# Altium PCB test_5.PcbDoc
Units mil, origin at the board's own origin, x right, y up, seen from the top; angles counter-clockwise.
Board outline 4412.04 x 5197.88 mil, 4 copper layers (Top Layer, Mid-Layer Top, Mid-Layer Bottom, Bottom Layer); 121 components, 95 nets, 430 pads, 38 vias.
Unrouted connection lines stored in the file: 182.
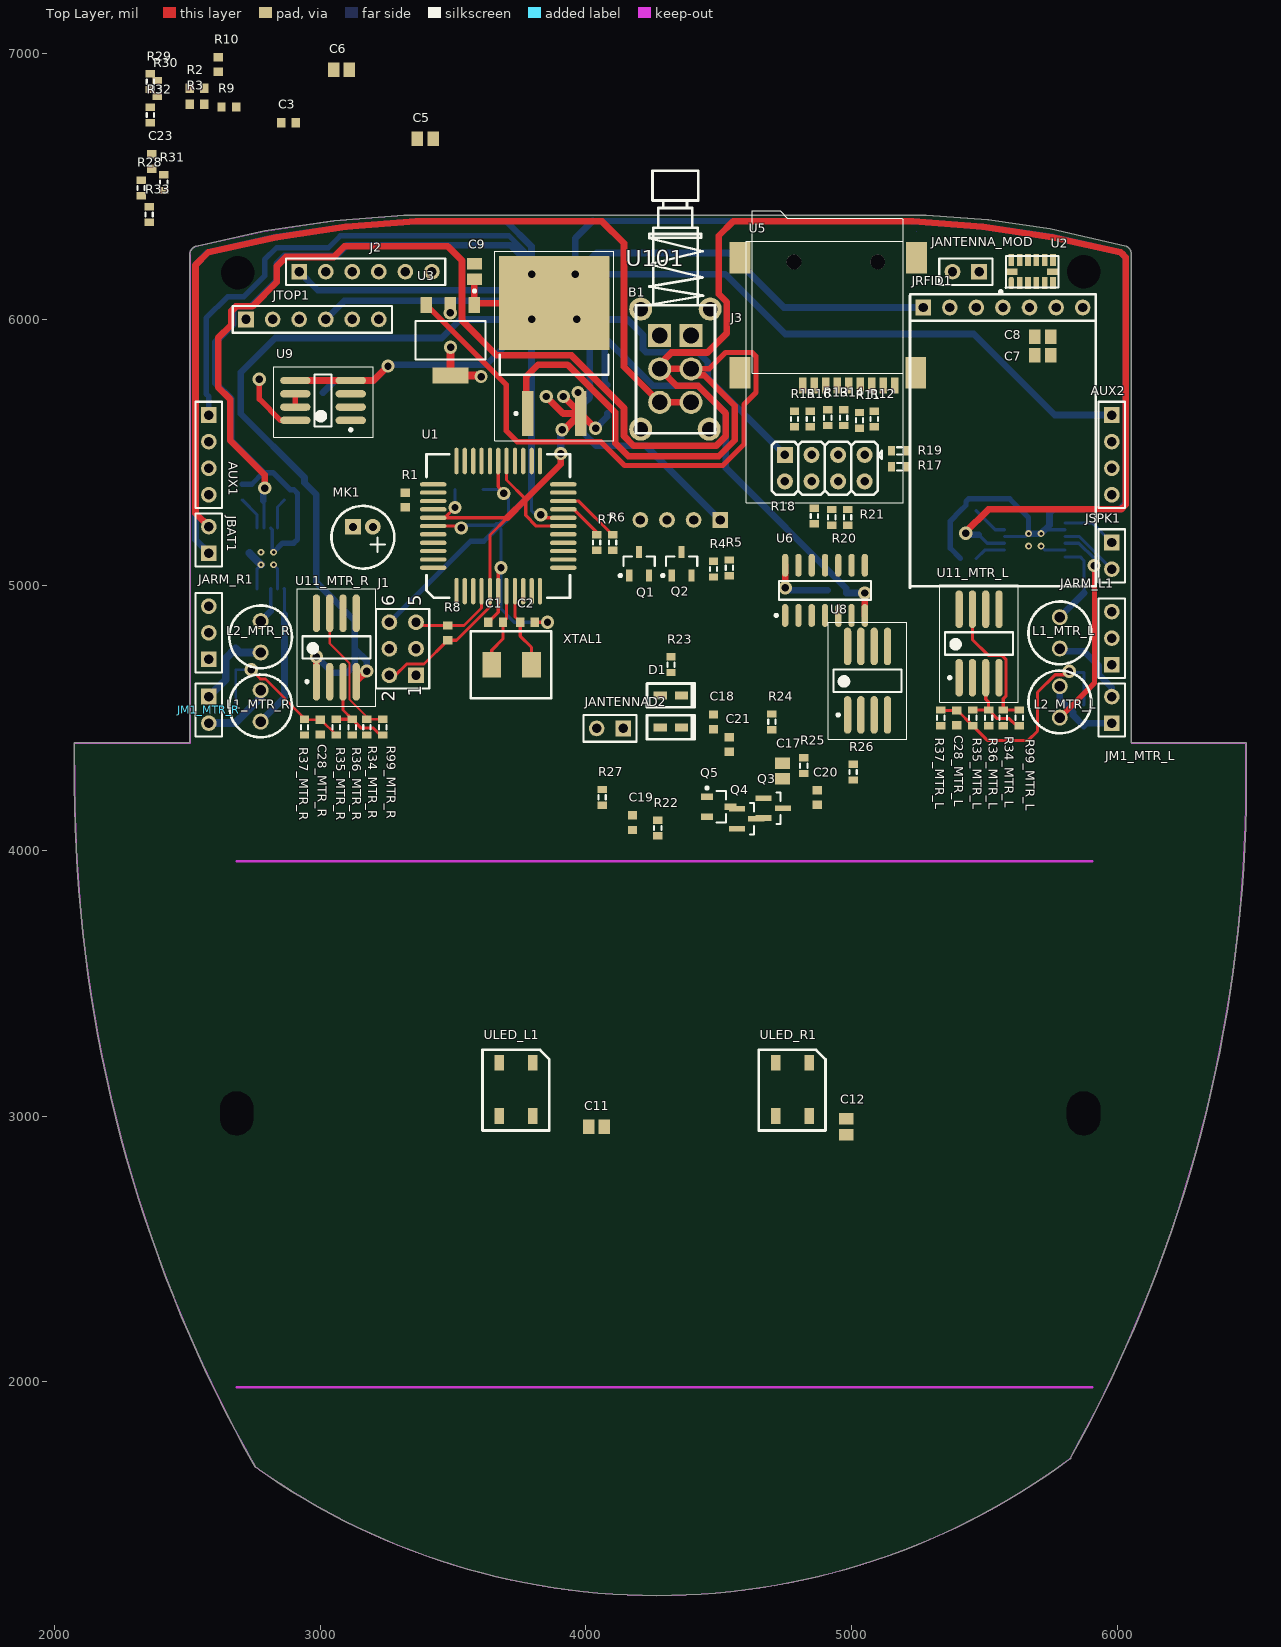
[diagram p0: Top Layer view]
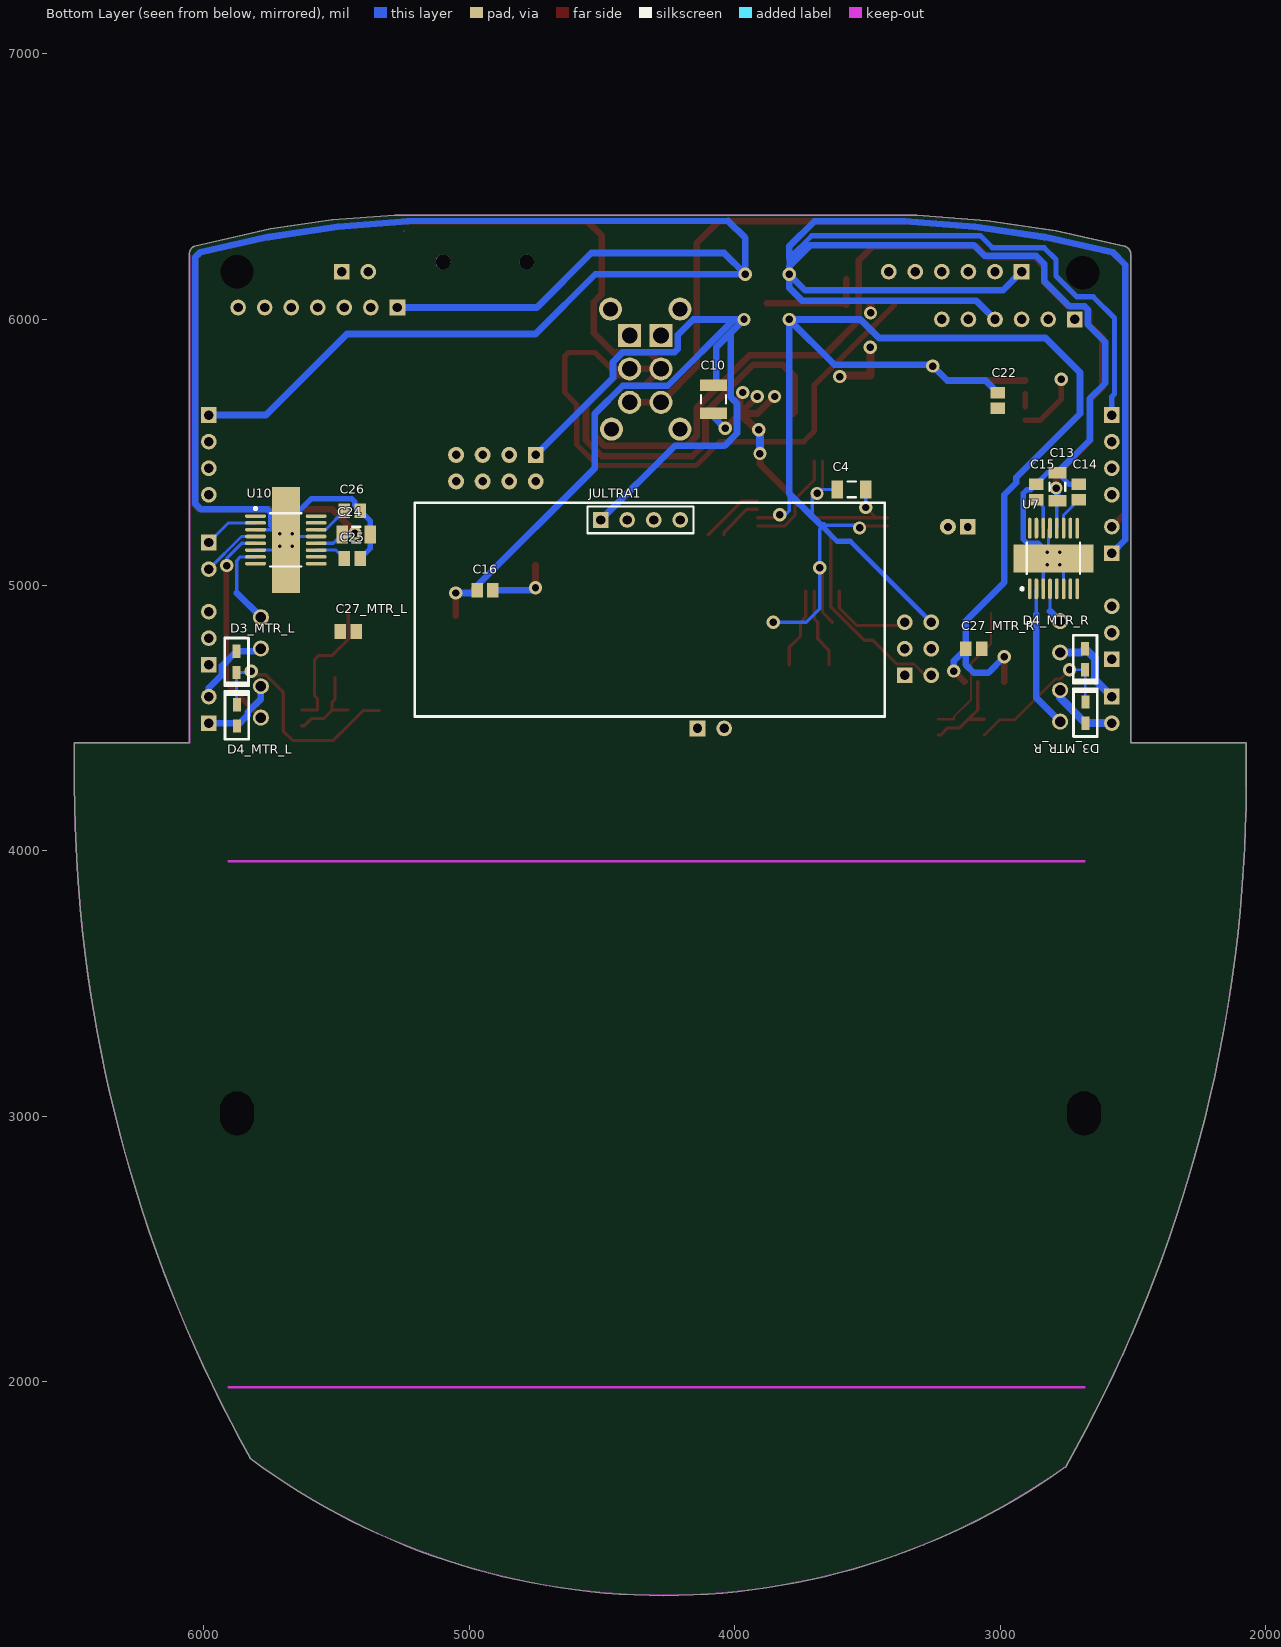
[diagram p1: Bottom Layer view, seen from below]
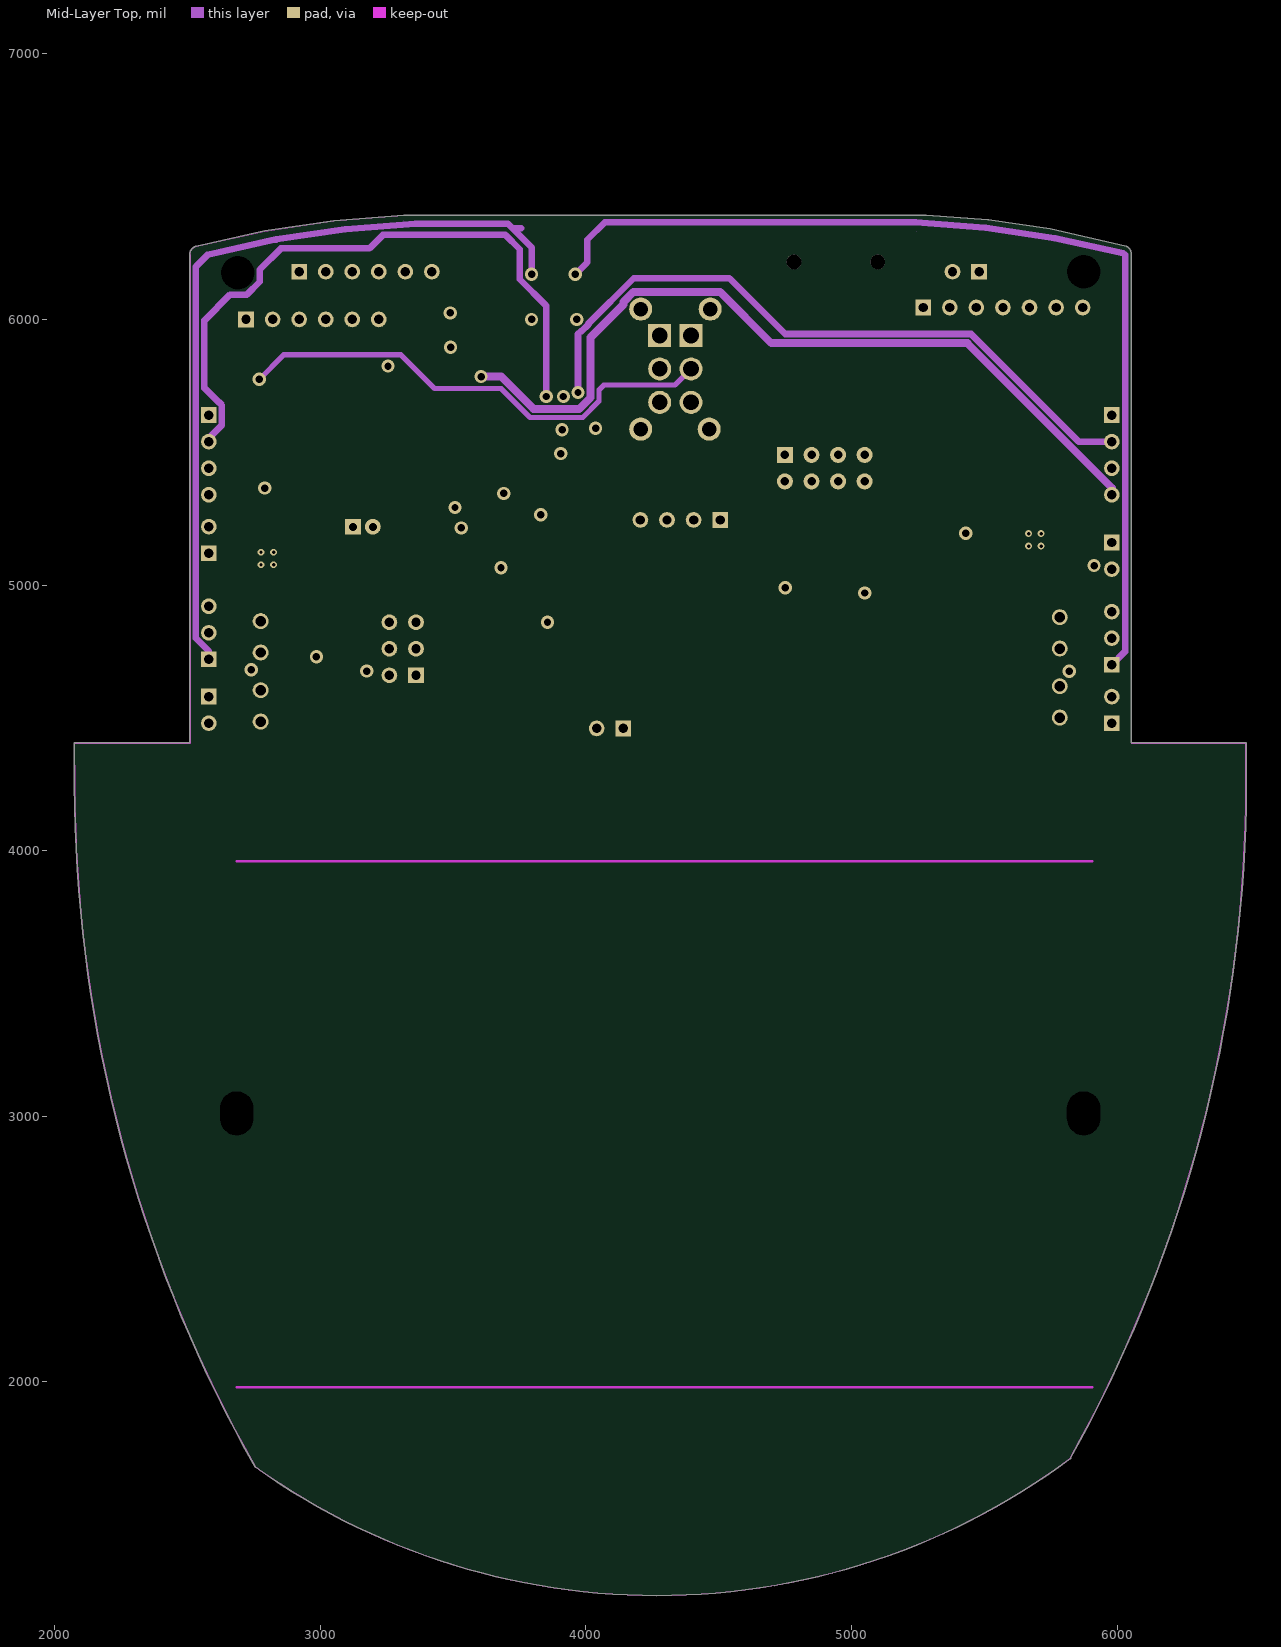
[diagram p2: Mid-Layer Top]
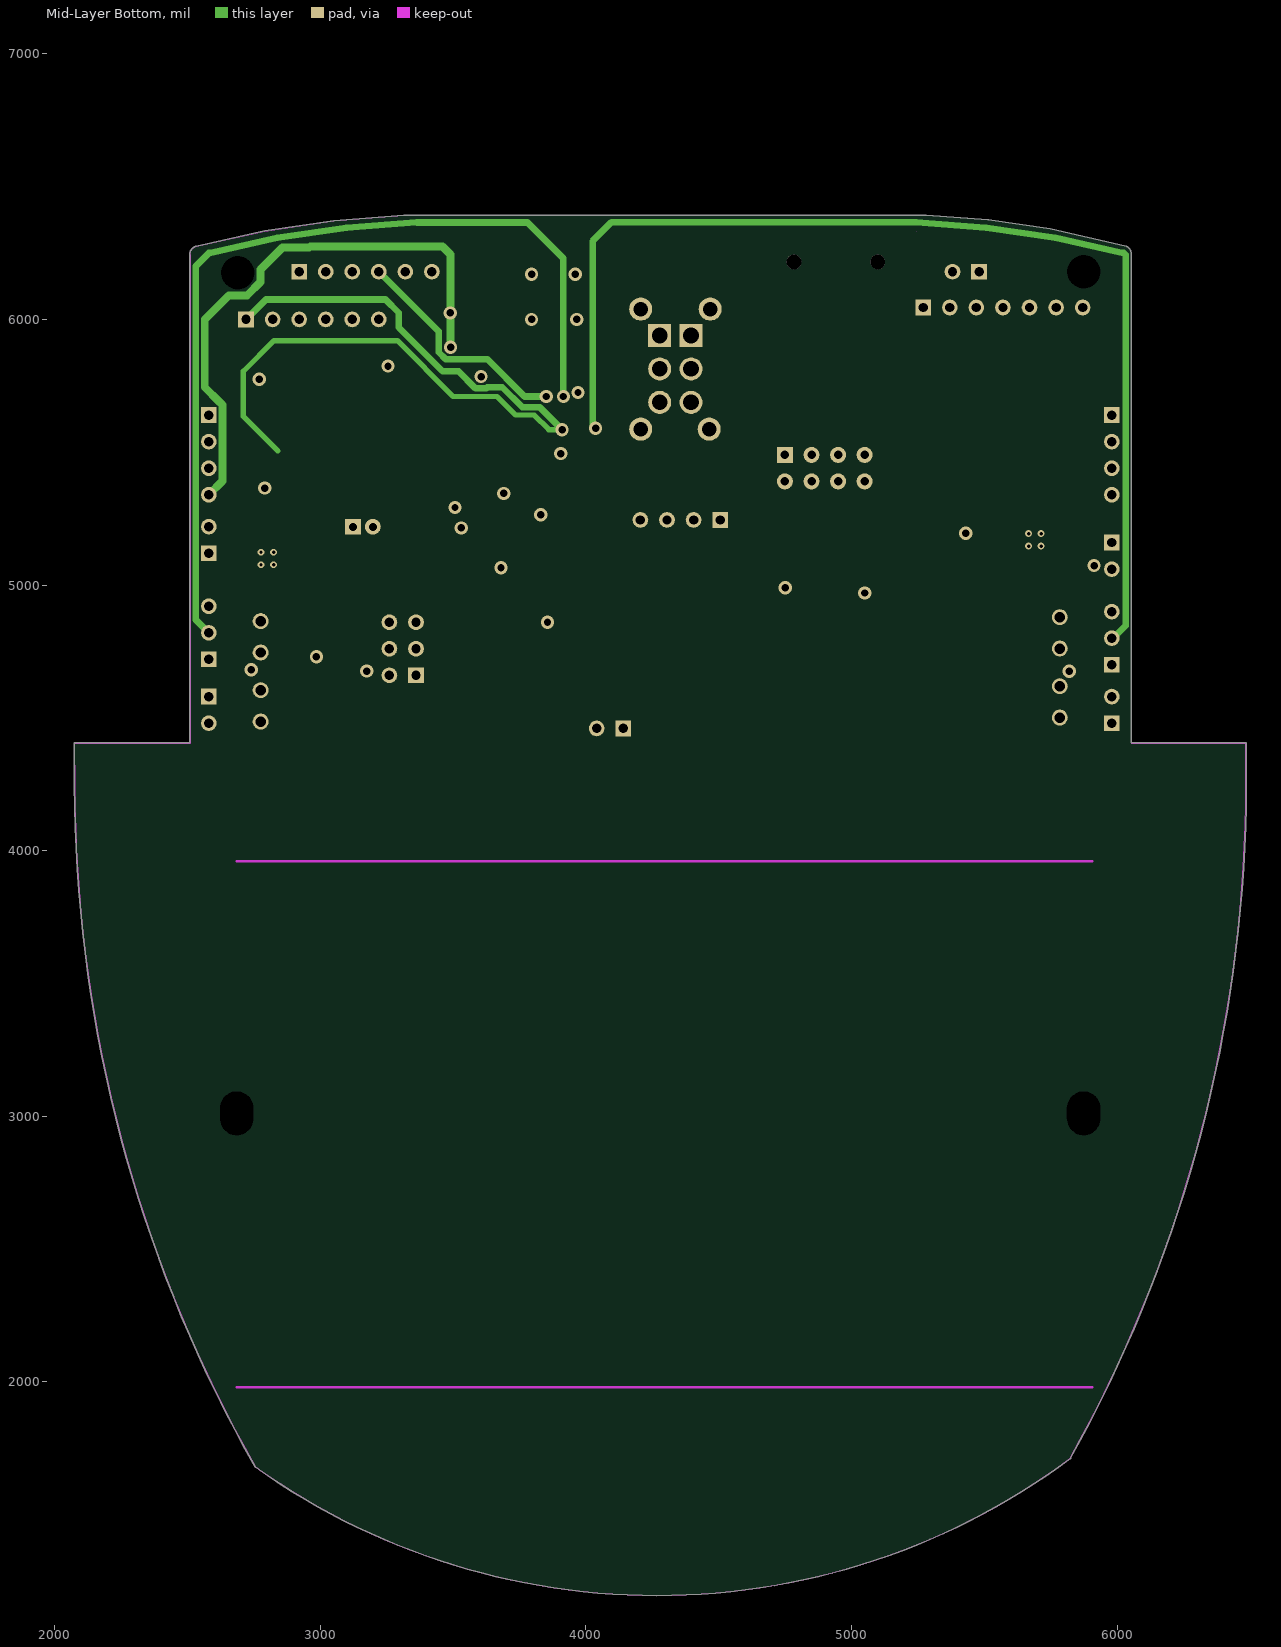
[diagram p3: Mid-Layer Bottom]

## Layer stack, top to bottom
Top Layer: signal copper 1.4
Dielectric: core 12.6, FR-4, Dk 4.8
Mid-Layer Top: signal copper 0.7
Dielectric: prepreg 12.6, FR-4, Dk 4.8
Mid-Layer Bottom: signal copper 0.7
Dielectric: core 12.6, FR-4, Dk 4.8
Bottom Layer: signal copper 1.4

## Board outline
2073.99,4249.98 cw(c7308.62,4260.06) 2073.99,4270.14 2073.99,4405 cw(c2075,4405) 2075,4406.02 2508.06,4406.02 2508.04,6244.45 cw(c2509.05,6244.45) 2508.04,6244.48 2508.11,6246.69 cw(c2509.13,6246.66) 2508.12,6246.76 2508.35,6248.96 cw(c2509.36,6248.85) 2508.36,6249.03 2508.74,6251.2 cw(c2509.74,6251.03) 2508.76,6251.26 cw(c2509.74,6251.03) 2508.76,6251.28 2509.29,6253.41 cw(c2510.28,6253.17) 2509.3,6253.42 2509.29,6253.42 cw(c2510.28,6253.17) 2509.31,6253.48 2510,6255.58 cw(c2510.96,6255.27) 2510.02,6255.65 2510.85,6257.7 cw(c2511.79,6257.32) 2510.88,6257.76 2511.84,6259.74 cw(c2512.76,6259.3) 2511.88,6259.81 2511.87,6259.8 cw(c2512.76,6259.3) 2511.88,6259.81 2512.97,6261.71 cw(c2513.86,6261.21) 2512.98,6261.73 cw(c2513.86,6261.21) 2513.02,6261.78 2513.01,6261.78 cw(c2513.86,6261.21) 2513.02,6261.79 2514.25,6263.61 cw(c2515.1,6263.04) 2514.26,6263.62 2514.25,6263.61 cw(c2515.1,6263.04) 2514.3,6263.67 2515.65,6265.41 cw(c2516.45,6264.78) 2515.7,6265.46 2517.18,6267.1 cw(c2517.93,6266.42) 2517.22,6267.15 cw(c2517.93,6266.42) 2517.23,6267.16 2518.81,6268.68 cw(c2519.52,6267.96) 2518.82,6268.7 cw(c2519.52,6267.96) 2518.87,6268.74 2520.56,6270.15 2520.56,6270.16 cw(c2521.21,6269.38) 2520.61,6270.2 cw(c2521.21,6269.38) 2520.62,6270.2 2522.39,6271.49 cw(c2523,6270.68) 2522.4,6271.5 cw(c2523,6270.68) 2522.46,6271.54 2524.33,6272.71 cw(c2524.87,6271.85) 2524.39,6272.74 2526.35,6273.78 cw(c2526.82,6272.88) 2526.41,6273.81 2526.42,6273.81 2528.42,6274.7 cw(c2528.84,6273.78) 2528.43,6274.71 cw(c2528.84,6273.78) 2528.52,6274.74 2531.81,6275.83 cw(c2532.65,6275.26) 2532.43,6276.25 2789.99,6333.21 cw(c2790.21,6332.22) 2790.06,6333.22 2790.07,6333.22 3050.97,6372.07 cw(c3051.13,6371.07) 3050.98,6372.08 cw(c3051.13,6371.07) 3051.05,6372.08 3314.4,6392.63 cw(c3315.24,6392.05) 3315.24,6393.06 5279.84,6393.06 cw(c5280.12,6392.09) 5280.2,6393.1 5514.78,6375.38 cw(c5514.71,6374.36) 5514.79,6375.37 cw(c5514.71,6374.36) 5514.85,6375.37 5514.86,6375.37 ccw(c5514.71,6374.36) 5514.85,6375.37 ccw(c5514.71,6374.36) 5514.78,6375.37 5514.86,6375.37 5747.62,6341.33 cw(c5747.48,6340.32) 5747.63,6341.33 5747.62,6341.33 cw(c5747.48,6340.32) 5747.7,6341.31 6034.58,6276.02 cw(c6034.35,6275.03) 6035.31,6275.36 6036.7,6274.64 cw(c6036.24,6273.74) 6036.71,6274.63 cw(c6036.24,6273.74) 6036.77,6274.6 6036.76,6274.61 ccw(c6036.24,6273.74) 6036.71,6274.64 6036.77,6274.6 6038.65,6273.46 6038.65,6273.45 cw(c6038.13,6272.59) 6038.71,6273.42 cw(c6038.13,6272.59) 6038.72,6273.41 6040.51,6272.14 cw(c6039.93,6271.31) 6040.52,6272.13 6040.51,6272.14 cw(c6039.93,6271.31) 6040.57,6272.09 6042.27,6270.69 cw(c6041.63,6269.91) 6042.33,6270.65 6042.32,6270.65 cw(c6041.63,6269.91) 6042.33,6270.64 6043.93,6269.14 cw(c6043.24,6268.39) 6043.94,6269.13 6043.93,6269.13 cw(c6043.24,6268.39) 6043.98,6269.08 6045.47,6267.46 cw(c6044.73,6266.77) 6045.52,6267.4 6046.9,6265.68 cw(c6046.11,6265.05) 6046.94,6265.62 6048.2,6263.81 cw(c6047.36,6263.23) 6048.23,6263.75 6048.24,6263.74 6049.36,6261.86 cw(c6048.49,6261.33) 6049.36,6261.85 cw(c6048.49,6261.33) 6049.39,6261.79 6050.38,6259.81 cw(c6049.48,6259.36) 6050.41,6259.75 6051.26,6257.71 cw(c6050.33,6257.32) 6051.29,6257.65 6051.99,6255.56 cw(c6051.03,6255.23) 6052.01,6255.49 6052.57,6253.36 cw(c6051.59,6253.1) 6052.59,6253.28 6052.99,6251.11 cw(c6052,6250.93) 6053,6251.04 6053.26,6248.86 cw(c6052.25,6248.74) 6053.27,6248.78 cw(c6052.25,6248.74) 6053.27,6248.74 6053.27,6248.78 6053.37,6246.22 cw(c6052.35,6246.18) 6053.37,6246.18 cw(c6052.35,6246.18) 6052.89,6245.31 cw(c6052.35,6244.45) 6053.37,6244.45 6053.37,4406.02 6485,4406.02 cw(c6485,4405) 6486.02,4405 6486.02,4245 cw(c6485,4245) 6486,4244.84 cw(c1251.38,4260.06) 5824.33,1712.58 cw(c5823.6,1711.88) 5824.62,1711.88 cw(c5823.6,1711.88) 5824.21,1711.06 cw(c4267.65,3801.61) 2755.04,1679.05 cw(c2755.11,1680.06) 2754.22,1679.56 cw(c7308.62,4260.06) 2074,4244.84 cw(c2075,4245) 2073.99,4245

## Design rules (kind name [scope] priority, off if disabled: settings)
Clearance [All] p1: gap=7
PolygonConnect [All] p1: connectstyle=Relief reliefconductorwidth=10 reliefentries=4 polygonreliefangle="90 Angle"
RoomDefinition QRFID [InComponentClass('QRFID')] p1: confinementstyle=ConfineIn formatcopy=TRUE lockcomponents=FALSE outline 3295,4385 5265,4385 5265,4850 3295,4850
RoomDefinition QMIC [InComponentClass('QMIC')] p2: confinementstyle=ConfineIn formatcopy=TRUE lockcomponents=FALSE outline 2730,5080 3355,5080 3355,5870 2730,5870
RoomDefinition MTR_R [InComponentClass('MTR_R')] p3: confinementstyle=ConfineIn formatcopy=TRUE lockcomponents=FALSE outline 2504.06,4415 3295,4415 3295,5065 2504.06,5065
RoomDefinition MTR_L [InComponentClass('MTR_L')] p4: confinementstyle=ConfineIn formatcopy=TRUE lockcomponents=FALSE outline 6045,5060 5270,5060 5270,4410 6045,4410
RoomDefinition main_pcb [InComponentClass('main_pcb')] p5: confinementstyle=ConfineIn formatcopy=TRUE lockcomponents=FALSE outline 2509.06,4385 6055,4385 6055,6595 2509.06,6595
RoutingVias [All] p1: holewidth=28 width=50 viastyle="Through Hole" minholewidth=28 minwidth=50 maxholewidth=28 maxwidth=50
SilkToSilkClearance [All] p1: silktosilkclearance=0
SilkscreenOverComponentPads [All] p1: minsilkscreentomaskgap=10
SolderMaskExpansion [All] p1: expansion=4
Width [All] p1: maxlimit=60 minlimit=7 preferedwidth=10 minimp=50.000000 maximp=50.000000 favimp=50.000000
26 further rules are at their usual default settings.

## Classes and differential pairs
component class main_pcb: AUX1 AUX2 B1 C1 C2 C3 C4 C5 C6 C7 C8 C9 C10 C11 C12 C13 C14 C15 C16 C24 C25 C26 J1 J2 J3 JANTENNA_MOD JARM_L1 JARM_R1 JBAT1 JRFID1 JSPK1 JTOP1 JULTRA1 Q1 Q2 R1 R2 R3 R4 R5 R6 R7 R8 R9 R10 R11 R12 R13 R14 R15 R16 R17 R18 R19 R20 R21 U1 U2 U3 U5 U6 U7 U10 U101 ULED_L1 ULED_R1 XTAL1
component class MTR_L: C27_MTR_L C28_MTR_L D3_MTR_L D4_MTR_L JM1_MTR_L L1_MTR_L L2_MTR_L R34_MTR_L R35_MTR_L R36_MTR_L R37_MTR_L R99_MTR_L U11_MTR_L
component class MTR_R: C27_MTR_R C28_MTR_R D3_MTR_R D4_MTR_R JM1_MTR_R L1_MTR_R L2_MTR_R R34_MTR_R R35_MTR_R R36_MTR_R R37_MTR_R R99_MTR_R U11_MTR_R
component class QMIC: C22 C23 MK1 R28 R29 R30 R31 R32 R33 U9
component class QRFID: C17 C18 C19 C20 C21 D1 D2 JANTENNA Q3 Q4 Q5 R22 R23 R24 R25 R26 R27 U8
channel class motor: MTR_L MTR_R

## Components (designator, comment, footprint, x,y, rotation, side; value= is the part's Value field where it differs from the comment)
AUX1 "Header 4H" HDR1X4 2580,5640 r270 top
AUX2 "Header 4H" HDR1X4 5980,5640 r270 top
B1 "ON/OFF" KGPS22F03 4330,5810 r0 top
C1 "24pF" CAPC1608L 3660,4860 r0 top
C2 "24pF" CAPC1608L 3780,4860 r180 top
C3 "" CAPC1608L 2880,6740 r0 top
C4 "10uF" CAPC3216L 3560,5360 r180 bottom
C5 "0.1uF" CAPC2012L 3395,6680 r0 top
C6 "0.1uF" CAPC2012L 3080,6940 r0 top
C7 "Tantalum 1uF" CAPC2012L 5720,5865 r0 top
C8 "0.1uF" CAPC2012L 5720,5935 r0 top
C9 "" CAPC2012L 3580,6180 r270 top
C10 "100uF" CAPC3225L 4080,5700 r90 bottom
C11 "" CAPC2012L 4040,2960 r0 top
C12 "" CAPC2012L 4980,2960 r90 top
C13 "10uF" CAPC3216L 2785,5370 r270 bottom
C14 "10nF/16V" CAPC2012L 2705,5350 r270 bottom
C15 "2.2uF" CAPC2012L 2865,5350 r270 bottom
C16 "0.1uF" CAPC2012L 4940,4980 r0 bottom
C17 "" CAPC2012L 4740,4300 r90 top
C18 "0.1uF" CAPC1608L 4480,4485 r90 top
C19 "" CAPC1608L 4175,4105 r90 top
C20 "" CAPC1608L 4870,4200 r90 top
C21 "" CAPC1608L 4540,4400 r90 top
C22 "" CAPC2012L 3010,5695 r90 bottom
C23 "" CAPC1608L 2365,6595 r90 top
C24 "10uF" CAPC3216L 5425,5190 r0 bottom
C25 "10nF/16V" CAPC2012L 5440,5100 r0 bottom
C26 "2.2uF" CAPC2012L 5440,5280 r0 bottom
C27_MTR_L "" CAPC2012L 5455,4825 r180 bottom (schematic designator C27)
C27_MTR_R "" CAPC2012L 3100,4760 r0 bottom (schematic designator C27)
C28_MTR_L "" CAPC1608L 5395.94,4500 r270 top (schematic designator C28)
C28_MTR_R "" CAPC1608L 3000,4465 r270 top (schematic designator C28)
D1 "B5817WS-TP" SOD_323 4320,4585 r0 top
D2 "B5817WS-TP" SOD_323 4320,4465 r0 top
D3_MTR_L "B5817WS-TP" SOD_323 5875,4710 r270 bottom (schematic designator D3)
D3_MTR_R "B5817WS-TP" SOD_323 2680,4520 r90 bottom (schematic designator D3)
D4_MTR_L "B5817WS-TP" SOD_323 5875,4510 r90 bottom (schematic designator D4)
D4_MTR_R "B5817WS-TP" SOD_323 2680,4720 r270 bottom (schematic designator D4)
J1 "ISP" HDR2X3 3360,4660 r90 top
J2 "USB CP2102" HDR1X6 2920,6180 r0 top
J3 "micro SD" MICRO_SD 4920,6080 r0 top locked
JANTENNA "ANTENNA" HDR1X2 4140,4460 r180 top
JANTENNA_MOD "ANTENNA_MOD" HDR1X2 5480,6180 r180 top
JARM_L1 "Header 3H" HDR1X3 5980,4700 r90 top
JARM_R1 "Header 3H" HDR1X3 2580,4720 r90 top
JBAT1 "Header 2" HDR1X2 2580,5120 r90 top
JM1_MTR_L "" HDR1X2 5980,4480 r90 top (schematic designator JM1)
JM1_MTR_R "" HDR1X2 2580,4580 r270 top (schematic designator JM1)
JRFID1 "RFID" HDR1X7 5270,6045 r0 top
JSPK1 "HDR1X2H" HDR1X2 5980,5160 r270 top
JTOP1 "" HDR1X6 2720,6000 r0 top
JULTRA1 "Header 4" HDR1X4 4505,5245 r180 bottom
L1_MTR_L "1.5mH" InductorThruHole 5784.06,4820 r270 top (schematic designator L1)
L1_MTR_R "1.5mH" InductorThruHole 2775,4545 r90 top (schematic designator L1)
L2_MTR_L "1.5mH" InductorThruHole 5784.06,4560 r270 top (schematic designator L2)
L2_MTR_R "1.5mH" InductorThruHole 2775,4805 r90 top (schematic designator L2)
MK1 "Mic2" electret_6mm 3160,5180 r0 top
Q1 "IRLML2402" SOT-23_N 4200,5080 r90 top
Q2 "IRLML2402" SOT-23_N 4360,5080 r90 top
Q3 "SS8550" SOT23_BJT 4705,4160 r0 top
Q4 "SS8050" SOT23_BJT 4605,4120 r0 top
Q5 "IRLML2402" SOT-23_N 4500,4165 r0 top
R1 "" CAPC1608L 3320,5320 r90 top
R2 "" CAPC1608L 2535,6870 r0 top
R3 "" CAPC1608L 2535,6810 r0 top
R4 "" RESC1608L 4480,5060 r270 top
R5 "" RESC1608L 4540,5065 r270 top
R6 "" RESC1608L 4100,5160 r90 top
R7 "" RESC1608L 4040,5160 r90 top
R8 "" CAPC1608L 3480,4820 r90 top
R9 "" CAPC1608L 2655,6800 r0 top
R10 "" CAPC1608L 2615,6960 r90 top
R11 "" RESC1608L 5030,5620 r270 top
R12 "" RESC1608L 5085,5625 r270 top
R13 "" RESC1608L 4910,5630 r270 top
R14 "" RESC1608L 4970,5630 r270 top
R15 "" RESC1608L 4785,5625 r270 top
R16 "" RESC1608L 4845,5625 r270 top
R17 "" RESC1608L 5180,5445 r0 top
R18 "" RESC1608L 4860,5260 r90 top
R19 "" RESC1608L 5180,5505 r0 top
R20 "" RESC1608L 4925,5255 r270 top
R21 "" RESC1608L 4985,5255 r270 top
R22 "2.2k" RESC1608L 4270,4085 r90 top
R23 "" RESC1608L 4320,4700 r90 top
R24 "(Optional)" RESC1608L 4700,4485 r90 top
R25 "1M" RESC1608L 4820,4320 r90 top
R26 "330k" RESC1608L 5005.55,4295.63 r90 top
R27 "2.2k" RESC1608L 4060.55,4200.63 r90 top
R28 "" RESC1608L 2325,6495 r90 top
R29 "" RESC1608L 2360,6895 r90 top
R30 "" RESC1608L 2385,6870 r90 top
R31 "" RESC1608L 2410,6515 r90 top
R32 "" RESC1608L 2360,6770 r90 top
R33 "" RESC1608L 2355,6395 r90 top
R34_MTR_L "" RESC1608L 5570.94,4500 r90 top (schematic designator R34)
R34_MTR_R "" RESC1608L 3175,4465 r90 top (schematic designator R34)
R35_MTR_L "" RESC1608L 5455.94,4500 r90 top (schematic designator R35)
R35_MTR_R "" RESC1608L 3060,4465 r90 top (schematic designator R35)
R36_MTR_L "" RESC1608L 5515.94,4500 r90 top (schematic designator R36)
R36_MTR_R "" RESC1608L 3120,4465 r90 top (schematic designator R36)
R37_MTR_L "" RESC1608L 5335.94,4500 r270 top (schematic designator R37)
R37_MTR_R "" RESC1608L 2940,4465 r270 top (schematic designator R37)
R99_MTR_L "" RESC1608L 5630.94,4500 r90 top (schematic designator R99)
R99_MTR_R "" RESC1608L 3235,4465 r90 top (schematic designator R99)
U1 "MCU" atmega644p 3680,5260 r180 top
U2 "ADXL345" ADXL345 5680,6180 r90 top
U3 "LM1117_3.3" LM1117 3500,5935 r90 top
U5 "ESP8266" ESP8266 4840,5440 r90 top locked
U6 "SN74HC08D" D014_N 4900,4980 r90 top
U7 "DRV8833" DRV8833#1 2800,5100 r90 bottom
U8 "LM311DR" LM311DR 5060,4640 r90 top
U9 "LM358D" LM358D 3010,5695 r180 top
U10 "DRV8833" DRV8833#2 5690,5170 r180 bottom
U11_MTR_L "LM311DR" LM311DR 5480,4780 r90 top (schematic designator U11)
U11_MTR_R "LM311DR" LM311DR 3060,4765 r90 top (schematic designator U11)
U101 "L7805CD2T" L7805CD2T 3880,5900 r90 top
ULED_L1 "WS2812B" WS2812B 3740,3100 r90 top
ULED_R1 "WS2812B" WS2812B 4780,3100 r90 top
XTAL1 "445W33F16M00000" 445W33F16M00000 3720,4700 r180 top

## Footprints (in the part's own frame and the unit in brackets; to place one, negate y for a bottom-side part, rotate by r counter-clockwise, add the part's x,y. Pads: shape width x height; smd on the part's side, far side on the other; paste and mask are expansions set on the pad)
445W33F16M00000 [mm]
  rect 1.8x2.4 smd: 1(-1.9,0) 2(1.9,0)
  silkscreen extent -3.8,-3.2 3.9,3.2
ADXL345 [mm] "BGA, 14-Leads, Body 5.0x3.0mm,  Pitch 0.80mm"
  oct 1.145x0.55 smd: 1(-1.1,2)
  rect 1.145x0.55 smd: 2(-1.1,1.2) 3(-1.1,0.4) 4(-1.1,-0.4) 5(-1.1,-1.2) 6(-1.1,-2) 8(1.1,-2) 9(1.1,-1.2) 10(1.1,-0.4) 11(1.1,0.4) 12(1.1,1.2) 13(1.1,2)
  rect 0.6x1.145 smd: 7(0,-2) 14(0,2)
  silkscreen extent -2.05,-2.5 1.5,3.12, body extent -1.5,-2.5 1.5,2.5, height 1
atmega644p [mil]
  oval 16x100 smd: 1(167.45,282.95) 2(136.45,282.95) 3(104.45,282.95) 4(73.45,282.95) 5(41.45,282.95) 6(10.45,282.95) 7(-20.55,282.95) 8(-52.55,282.95) 9(-83.55,282.95) 10(-115.55,282.95) 11(-146.55,282.95) 23(-146.55,-207.05) 24(-115.55,-207.05) 25(-83.55,-207.05) 26(-52.55,-207.05) 27(-20.55,-207.05) 28(10.45,-207.05) 29(41.45,-207.05) 30(73.45,-207.05) 31(104.45,-207.05) 32(136.45,-207.05) 33(167.45,-207.05)
  oval 100x16 smd: 12(-234.55,194.95) 13(-234.55,163.95) 14(-234.55,131.95) 15(-234.55,100.95) 16(-234.55,68.95) 17(-234.55,37.95) 18(-234.55,6.95) 19(-234.55,-25.05) 20(-234.55,-56.05) 21(-234.55,-88.05) 22(-234.55,-119.05) 34(255.45,-119.05) 35(255.45,-88.05) 36(255.45,-56.05) 37(255.45,-25.05) 38(255.45,6.95) 39(255.45,37.95) 40(255.45,68.95) 41(255.45,100.95) 42(255.45,131.95) 43(255.45,163.95) 44(255.45,194.95)
  silkscreen extent -260,-232 280,308, body extent -183,-162 227,244, height 39
CAPC1608L [mm] "Chip Capacitor, Body 1.6x0.8mm, IPC High Density"
  rect 0.8x0.9 smd: 1(-0.7,0) 2(0.7,0)
  body extent -0.87,-0.48 0.87,0.48, height 1.3
CAPC2012L [mm] "Chip Capacitor, Body 2.0x1.3mm, IPC High Density"
  rect 1.1x1.4 smd: 1(-0.75,0) 2(0.75,0)
  body extent -1.1,-0.72 1.1,0.72, height 1.4
CAPC3216L [mm] "Chip Capacitor, Body 3.2x1.6mm, IPC High Density"
  rect 1.1x1.7 smd: 1(-1.35,0) 2(1.35,0)
  silkscreen extent -0.4,-0.75 0.4,0.75, body extent -1.7,-0.9 1.7,0.9, height 1.3
CAPC3225L [mm] "Chip Capacitor, Body 3.2x2.5mm, IPC High Density"
  rect 1.1x2.6 smd: 1(-1.35,0) 2(1.35,0)
  silkscreen extent -0.4,-1.2 0.4,1.2, body extent -1.7,-1.35 1.7,1.35, height 1.5
D014_N [mm] "SOIC, 14-Leads, Body 8.7x3.9mm, Pitch 1.27mm, IPC Medium Density"
  oval 2.2x0.6 smd: 1(-2.4,3.81) 2(-2.4,2.54) 3(-2.4,1.27) 4(-2.4,0) 5(-2.4,-1.27) 6(-2.4,-2.54) 7(-2.4,-3.81) 8(2.4,-3.81) 9(2.4,-2.54) 10(2.4,-1.27) 11(2.4,0) 12(2.4,1.27) 13(2.4,2.54) 14(2.4,3.81)
  silkscreen extent -2.52,-4.4 0.9,4.78, body extent -1.95,-4.33 1.95,4.33, height 1.75
DRV8833#1 [mm]
  oval 2x0.35 smd: 1(-2.9,2.275) 2(-2.9,1.625) 3(-2.9,0.975) 4(-2.9,0.325) 5(-2.9,-0.325) 6(-2.9,-0.975) 7(-2.9,-1.625) 8(-2.9,-2.275) 9(2.9,-2.275) 10(2.9,-1.625) 11(2.9,-0.975) 12(2.9,-0.325) 13(2.9,0.325) 14(2.9,0.975) 15(2.9,1.625) 16(2.9,2.275)
  rect 2.7x7.62 smd: PP(0,0)
  silkscreen extent -3.02,-2.55 1.5,3.13, body extent -2.25,-2.55 2.25,2.55, height 1.2
DRV8833#2 [mm]
  oval 2x0.35 smd: 1(-2.9,2.275) 2(-2.9,1.625) 3(-2.9,0.975) 4(-2.9,0.325) 5(-2.9,-0.325) 6(-2.9,-0.975) 7(-2.9,-1.625) 8(-2.9,-2.275) 9(2.9,-2.275) 10(2.9,-1.625) 11(2.9,-0.975) 12(2.9,-0.325) 13(2.9,0.325) 14(2.9,0.975) 15(2.9,1.625) 16(2.9,2.275)
  rect 2.7x10.16 smd: PP(0,0)
  silkscreen extent -3.03,-2.55 1.5,3.12, body extent -2.25,-2.55 2.25,2.55, height 1.2
electret_6mm [mil]
  round 60 hole 30: 1(37.4,39.37)
  rect 60x60 hole 30: 2(-37.4,39.37)
  silkscreen extent -118,-118 118,118
ESP8266 [mil]
  round 60 hole 32: CH_PD(-49.94,-9.12) GPIO0(50.06,-109.12) GPIO2(50.06,-9.12) RST(-49.94,-109.12) RXD(50.06,-209.12) TXD(-49.94,90.88) VCC(-49.94,-209.12)
  rect 60x60 hole 32: GND(50.06,90.88)
  silkscreen extent -130,-354 854,236, body extent -94,-248 91,130, height 315
HDR1X2 [mm] "Connector; Header; 2 Position"
  rect 1.5x1.5 hole 0.9: 1(0,0)
  round 1.5 hole 0.9: 2(2.54,0)
  silkscreen extent -1.27,-1.27 3.81,1.27
HDR1X3 [mm] "Connector; Header; 3 Position"
  rect 1.5x1.5 hole 0.9: 1(0,0)
  round 1.5 hole 0.9: 2(2.54,0) 3(5.08,0)
  silkscreen extent -1.27,-1.27 6.35,1.27
HDR1X4 [mm] "Connector; Header; 4 Position"
  rect 1.5x1.5 hole 0.9: 1(0,0)
  round 1.5 hole 0.9: 2(2.54,0) 3(5.08,0) 4(7.62,0)
  silkscreen extent -1.27,-1.27 8.89,1.27
HDR1X6 [mm] "Connector; Header; 6 Position"
  rect 1.5x1.5 hole 0.9: 1(0,0)
  round 1.5 hole 0.9: 2(2.54,0) 3(5.08,0) 4(7.62,0) 5(10.16,0) 6(12.7,0)
  silkscreen extent -1.27,-1.27 13.97,1.27
HDR1X7 [mm] "Connector; Header; 7 Position"
  rect 1.5x1.5 hole 0.9: 1(0,0)
  round 1.5 hole 0.9: 2(2.54,0) 3(5.08,0) 4(7.62,0) 5(10.16,0) 6(12.7,0) 7(15.24,0)
  silkscreen extent -1.27,-1.27 16.51,1.27
HDR2X3 [mm] "Connector; Header; 3x2 Position"
  rect 1.5x1.5 hole 0.9: 1(0,0)
  round 1.5 hole 0.9: 2(0,2.54) 3(2.54,0) 4(2.54,2.54) 5(5.08,0) 6(5.08,2.54)
  silkscreen extent -1.27,-1.27 6.35,3.81
InductorThruHole [mil]
  round 60 hole 39.37: 1(-59.06,0) 2(59.06,0)
  silkscreen extent -118,-118 118,118
KGPS22F03 [mm]
  round 2.2 hole 1.4: 0(-3.146,-5.666) 0(-3.146,5.814) 0(3.399,-5.666) 0(3.5,5.814)
  rect 2.2x2.2 hole 1.5: 1(-1.334,3.296) 6(1.666,3.296)
  round 2.2 hole 1.5: 2(-1.334,0.096) 3(-1.334,-3.104) 4(1.666,-3.104) 5(1.666,0.096)
  silkscreen extent -3.59,-6.05 3.96,19.04, body extent -3.15,-5.7 3.5,19, height 9
L7805CD2T [mm] "D2-PAK, 3-Pads, Body 9.4x10.4mm (max), IPC Low Density"
  rect 4.3x1.1 smd: 5V(-6.45,-2.54) IN(-6.45,2.54)
  rect 9x10.55 smd: GND(4.1,0)
  silkscreen extent -9.05,-5.7 9.05,5.7, body extent -2.75,-5.2 6.6,5.2, height 4.6
LM311DR [mm] "SOIC, 8-Leads, Body 6.5x5.6mm (max), Pitch 1.27mm, IPC Low Density"
  oval 3.6x0.7 smd: 1(-3.275,1.905) 2(-3.275,0.635) 3(-3.275,-0.635) 4(-3.275,-1.905) 5(3.275,-1.905) 6(3.275,-0.635) 7(3.275,0.635) 8(3.275,1.905)
  silkscreen extent -5.6,-3.75 5.6,3.75, body extent -2.8,-3.25 2.8,3.25, height 2
LM358D [mm] "SOIC, 8-Leads, Body 5.0x4.0mm (max), Pitch 1.27mm, IPC Low Density"
  oval 2.9x0.7 smd: 1(-2.65,1.905) 2(-2.65,0.635) 3(-2.65,-0.635) 4(-2.65,-1.905) 5(2.65,-1.905) 6(2.65,-0.635) 7(2.65,0.635) 8(2.65,1.905)
  silkscreen extent -4.8,-3.2 4.7,3.5, body extent -2,-2.5 2,2.5, height 1.75
LM1117 [mm]
  rect 1.55x1.1 smd: 1(3.045,-2.031) 2(3.045,0.269) 3(3.045,2.569)
  rect 1.55x3.45 smd: 2(-3.705,0.269)
  silkscreen extent -2.18,-3.08 4.49,3.62, body extent -2.11,-3.01 1.49,3.59, height 4
MICRO_SD [mm]
  rect 2x3 smd: 0(-8.658,-7.124) 0(-8.658,3.876) 0(8.166,-7.124) 0(8.241,3.876)
  round 1.4 hole 1.4: 0(4.523,3.463) 1(-3.477,3.463)
  rect 0.7x1.5 smd: 1(-2.634,-8.349) 2(-1.534,-8.349) 3(-0.434,-8.349) 4(0.666,-8.349) 5(1.766,-8.349) 6(2.866,-8.349) 7(3.966,-8.349) 8(5.066,-8.349) 9(6.166,-8.349)
  silkscreen extent -7.45,-7.2 6.97,8.35, body extent -7.45,-7.24 6.95,12.26, height 4
RESC1608L [mm] "Chip Resistor, Body 1.6x0.8mm, IPC High Density"
  rect 0.7x0.9 smd: 1(-0.75,0) 2(0.75,0)
  silkscreen extent -0.2,-0.35 0.2,0.35, body extent -0.85,-0.48 0.85,0.48, height 0.9
SOD_323 [mil]
  rect 50x30 smd: 1(-40.55,-0.63) 2(39.45,-0.63)
  silkscreen extent -91,-46 89,44
SOT23_BJT [mm] "SOT23, 3-Leads, Body 3.0x2.6mm (max), Pitch 0.95mm, IPC Medium Density"
  rect 1.55x0.55 smd: B(-0.925,0.95) C(0.925,0) E(-0.925,-0.95)
  silkscreen extent 0.3,-1.5 0.7,1.5, body extent -0.7,-1.5 0.7,1.5, height 1.1
SOT-23_N [mm] "SOT23, 3-Leads, Body 2.9x1.3mm, Pitch 0.95mm, Lead Span 2.3mm, IPC Medium Density"
  rect 1.15x0.6 smd: 1(-1.125,0.95) 2(-1.125,-0.95) 3(1.125,0)
  silkscreen extent -1.25,-1.5 0.7,1.92, body extent -0.7,-1.5 0.7,1.5, height 1.11
WS2812B [mm]
  rect 1.5x0.9 smd: 1(-2.519,1.678) 2(-2.519,-1.522) 3(2.581,-1.522) 4(2.581,1.678)
  silkscreen extent -3.9,-3.1 3.8,3.3, body extent -2.52,-2.42 2.48,2.58, height 0.6

## Part data
AUX1 AUX2: "Header, 4-Pin, Right Angle"
B1: library part Component_1
C1 C2 C3 C4 C11 C12 C13 C14 C15 C17 C18 C19 C20 C21 C22 C23 C24 C25 C26 C27_MTR_L C27_MTR_R C28_MTR_L C28_MTR_R: library part Cap, "Capacitor"
C5 C6: library part CAP0402
C7 C8 C9 C10 C16: library part "Cap Pol2", "Polarized Capacitor (Axial)"
J1: library part "Header 3X2", "Header, 3-Pin, Dual row"
J2 JTOP1: library part "Header 6", "Header, 6-Pin"
J3: library part "JJ TRANSFLASH", "Transflash Socket"
JANTENNA JANTENNA_MOD JM1_MTR_L JM1_MTR_R JSPK1: library part "Header 2", "Header, 2-Pin"
JARM_L1 JARM_R1: "Header, 3-Pin, Right Angle"
JBAT1: "Header, 2-Pin"
JRFID1: library part "Header 7", "Header, 7-Pin"
JULTRA1: "Header, 4-Pin"
L1_MTR_L L1_MTR_R L2_MTR_L L2_MTR_R: library part "Inductor Iron", "Magnetic-Core Inductor"
MK1: "Microphone"
Q1 Q2 Q5: "HEXFET Power MOSFET"
R1 R2 R3 R4 R5 R6 R7 R8 R9 R10 R11 R12 R13 R14 R15 R16 R17 R18 R19 R20 R21 R22 R23 R24 R25 R26 R27 R28 R29 R30 R31 R32 R33 R34_MTR_L R34_MTR_R R35_MTR_L R35_MTR_R R36_MTR_L R36_MTR_R R37_MTR_L R37_MTR_R R99_MTR_L R99_MTR_R: library part Res2, "Resistor"
U1: library part ATmega644-20AU, "8-bit AVR Microcontroller, 2.7-5.5V, 20MHz, 64KB Flash, 2KB EEPROM, 4KB SRAM, 44-pin TQFP"
U3: library part LM1117
U6: "Quadruple 2-Input Positive-AND Gate"
U9: "Dual Operational Amplifier"

## Free pads (board coordinates)
  round 60 hole 125.98 slot 165.35 at 90 deg: 2(2685,3010.71) 2(5873.98,3010.71)
  round 60 hole 125.98: 2(2689,6176) 2(5873.98,6180)

## Via types
v1: diameter 50, hole 28, Top Layer to Bottom Layer, 30 vias
v2: diameter 25.98, hole 12.99, Top Layer to Bottom Layer, tented top, 8 vias

## Nets (pads, with @x,y where several pads share a name; then routed paths per layer and width w, separated by ;. In a path a pad name is that pad's centre, name@x,y a point inside that pad or via, vN(x,y) a via of type N, cw(c..) or ccw(c..) an arc to the next point about the centre after c; other vN are vias at no path point)
ACCEL_INT: U1.21 U2.8
ARM_SERVO_L: JARM_L1.3 U1.31
ARM_SERVO_R: JARM_R1.3 U1.30
AUX1: AUX1.3 R2.2
AUX2: AUX2.3 R3.2
BATT_SENSE: R9.2 R10.1 U1.32
CS_SD: R15.2 U1.42
GND: AUX1.1 AUX2.1 C1.1 C2.1 C4.1 C5.1 C6.1 C7.2 C8.2 C9.2 C10.2 C11.2 C12.2 C13.1 C14.1 C15.1 C16.2 C17.2 C18.1 C19.1 C21.1 C22.2 C24.1 C25.1 C26.1 C27_MTR_L.2 C27_MTR_R.2 C28_MTR_L.2 C28_MTR_R.2 J1.6 J2.1 J3.6 JARM_L1.1 JARM_R1.1 JBAT1.1 JRFID1.1 JTOP1.4 JULTRA1.1 MK1.2 Q3.C R9.1 R12.2 R14.2 R16.2 R19.2 R21.2 R24.2 R27.2 R31.1 R36_MTR_L.1 R36_MTR_R.1 R37_MTR_L.2 R37_MTR_R.2 U1.6 U1.18 U1.28 U1.39 U2.2 U2.4 U2.5 U3.1 U5.GND U5.GPIO0 U5.GPIO2 U6.7 U7.3 U7.6 U7.13 U7.PP U8.1 U8.4 U9.4 U9.5 U10.3 U10.6 U10.13 U10.PP U11_MTR_L.1 U11_MTR_L.4 U11_MTR_R.1 U11_MTR_R.4 U101.GND ULED_L1.3 ULED_R1.3 | length 35362.5
  Top Layer w12: U1.39 v1@3522.95,5222.05 ; C1.1 3669.55,4897.11 U1.6 v1@3669.55,5054.55 ; U1.28 3669.55,5370.45 v1@3690,5350 ; C2.1 v1(3855,4860) ; v1@3841.95,5253.05 U1.18
  Top Layer w25: U9.5 U9.4 3200,5770 v1(3254.5,5824.5) ; U11_MTR_R.1 v1(2985,4730) ; U11_MTR_R.4 v1(3175,4676.06) ; C9.2 3579.95,6150.42 U3.1 3586.5,6061.42 U101.GND ; U6.7 v1(5050,4970)
  Mid-Layer Top w25: 2575,6243.06 2530.97,6199.03 2530.97,4799.69 2580,4750.66 JARM_R1.1 ; 2575.62,6244.26 2833.19,6301.22 3094.1,6340.07 3358.21,6360.68 3705.68,6360.68 3723.18,6343.18 ; 3756.82,6343.18 3723.18,6343.18 ; v1@3796.35,6171.35 3796.35,6270 3723.18,6343.18 ; v1(3960,6170) 4005,6215 4005,6300 4070.6,6365.6 5240.89,6365.6 5505,6345 5765.91,6306.15 6023.48,6249.19 ; JARM_L1.1 6030,4750 6030,6242.67
  Bottom Layer w12: U7.6 2761.61,5061.61 v2(2776.38,5076.38) ; U7.13 2818.5,5208.47 2818.5,5128.75 v2(2823.62,5123.62) ; v2(2823.62,5076.38) 2838.39,5061.61 U7.3 ; v1@3540,5225 3665,5225 ; C4.1 v1@3675,5360 ; 3670,5220 3680,5210 v1(3680,5065) 3680,4910 3730,4860 v1(3855,4860) ; 3707.97,5257.97 v1@3707.97,5332.03 ; 3795,5345 3795,5280 v1@3810,5265 ; U10.13 5655.55,5182.8 v2(5666.38,5193.62) ; v2(5713.62,5146.38) 5728.39,5131.61 U10.6 ; v2(5713.62,5193.62) 5728.39,5208.39 U10.3
  Bottom Layer w20: AUX1.1 2580,5710 2570,5720 2570,6005 2650,6085 2711.13,6085 2790,6163.87 2790,6225 2835,6270 3030,6270 3075,6315 3710,6315 3795,6230 3795,6200 ; C14.1 2741.38,5379.53 C13.1 2821.38,5423.15 2885.4,5359.13 2899.6,5359.13 2913.46,5345.27 2913.46,5171.8 2899.46,5157.8 2857.8,5157.8 v2(2823.62,5123.62) ; J1.6 3565,5165 3615,5165 3670,5220 3675,5225 ; C25.1 5371.85,5138.62 C24.1 5371.85,5241.38 C26.1 5430.87,5300.4 5430.87,5314.6 5440.83,5324.56 5595.44,5324.56 5666.38,5253.62 v2(5666.38,5193.62)
  Bottom Layer w25: JBAT1.1 2529.57,5170.43 2529.57,6205.83 2577.29,6253.56 2834.86,6310.52 3095.77,6349.37 3359.88,6369.97 3700,6369.97 3795,6274.97 3795,6230 ; C13.1 2663.15,5545 2663.15,5701.85 2605,5760 2605,5915 2670.97,5980.97 2670.97,6037.6 2682.4,6049.03 2739.03,6049.03 2835,6145 2835,6210 2865,6240 3060,6240 3100,6280 3715,6280 3795,6200 ; J2.1 2990,6110 3735,6110 v1(3795,6170) 3795,6120 3745,6070 3090,6070 JTOP1.4 ; v1(2985,4730) 3045,4670 3100,4670 3129.53,4699.53 C27_MTR_R.2 ; C22.2 3055.47,5770 3200,5770 v1(3254.5,5824.5) 3254.5,5829.5 3624.5,5829.5 v1(3795,6000) ; v1(3175,4676.06) 3175,4714.53 C27_MTR_R.2 ; 3665,5225 3675,5225 3707.97,5257.97 3795,5345 v1(3795,6000) ; C10.2 4070,5763.15 4070,5895 4014.5,5950.5 ; JULTRA1.1 4225.87,5524.13 4039,5524.13 3991.56,5571.57 3991.56,5683.63 4014.5,5706.57 4014.5,5950.5 ; U5.GND 4458.41,5780.78 4458.41,5839.81 4421.24,5876.97 4226.1,5876.97 4214.68,5888.4 4214.68,5941.52 4156.2,6000 4002.46,6000 ; v1@5045,4975 v1(5050,4970) 4979.53,4970 4979.53,4987.73 4526.63,5440.63 4526.63,5645.6 4421.61,5750.62 4251.84,5750.62 4002.46,6000 ; JRFID1.1 4745,6045 4540,6250 4040,6250 v1(3960,6170) ; v2(5666.38,5193.62) v2(5713.62,5193.62) 5745.3,5225.3 5745.3,5270.5 5760.76,5285.96 6010.96,5285.96 6031.85,5306.85 6031.85,6234.32 6017.59,6248.58 ; AUX2.1 5765,5640 5460,5945 4750,5945 4525,6170 v1(3960,6170) ; 6012.59,6253.58 5755.02,6310.54 5494.11,6349.4 5230,6370 4025,6371.08 3960,6306.08 v1(3960,6170) ; C27_MTR_R.2 3129.53,4865.47 2985,5010 2985,5340 2940,5385 2940,5405 2700,5645 2700,5800 2830,5930 3456.69,5930 3526.69,6000 v1(3795,6000) ; 4002.46,6000 v1(3965,6000) 4014.5,5950.5
  Bottom Layer w30: U7.PP@2732.76,5120 v2(2776.38,5076.38)
  other v1: 3530,5215 3830,5265 3690,5345
  other v2: 2776.38,5123.62 5666.38,5146.38
LEDS: U1.24 ULED_L1.4
MIC: R1.2 R28.2 U9.1
MISO: J1.1 J3.7 U1.2 U6.9
MOSI: J1.4 R13.2 U1.1 U6.4
MTR_L_BCK: J1.3 R11.2 U1.3 U6.12
MTR_L_EN: U1.13 U6.10 U6.13
MTR_L_PULSE: R34_MTR_R.2 R99_MTR_R.2 U1.34 U11_MTR_R.7 | length 517.4
  Top Layer w8: U11_MTR_R.7 3035,4780 3110.22,4704.78 3110.22,4568.71 3175,4503.93 R34_MTR_R.2 R99_MTR_R.2
MTR_R_EN: U1.14 U6.2 U6.5
MTR_R_FWD: U1.43 U6.1
MTR_R_PULSE: U1.33
NetC1_2: C1.2 U1.7 XTAL1.2 | length 300
  Top Layer w12: XTAL1.2 3645.2,4755.2 3687.56,4797.56 C1.2 3700.55,4872.99 U1.7
NetC2_2: C2.2 U1.8 XTAL1.1 | length 302.8
  Top Layer w12: U1.8 3732.55,4879.89 C2.2 3752.44,4807.56 3794.8,4765.2 XTAL1.1
NetC3_1: C3.1 J2.6
NetC6_2: C6.2 U1.29
NetC14_2: C14.2 U7.11 | length 129.7
  Bottom Layer w12: C14.2 2761.61,5263.86 U7.11
NetC15_2: C15.2 U7.14 | length 117.3
  Bottom Layer w12: U7.14 2838.39,5293.86 C15.2
NetC18_2: C18.2 D1.2 R24.1 U8.2
NetC19_2: C19.2 C20.2 JANTENNA.1
NetC20_1: C20.1 C21.2 Q5.1
NetC23_1: C23.1 R30.1
NetC23_2: C23.2 MK1.1 R29.2
NetC25_2: C25.2 U10.11 | length 119.4
  Bottom Layer w12: C25.2 5501.14,5131.61 U10.11
NetC26_2: C26.2 U10.14 | length 136.2
  Bottom Layer w12: C26.2 5469.53,5279.67 5540.81,5208.39 U10.14
NetC28_MTR_L_1: C28_MTR_L.1 D3_MTR_L.2 D4_MTR_L.2 R35_MTR_L.1 R37_MTR_L.1 | length 899.6
  Top Layer w12: R37_MTR_L.1@5337.91,4527.56 C28_MTR_L.1 5398.85,4527.56 R35_MTR_L.1 5511.41,4415 5665,4415 5700,4450 5700,4595.81 5766.25,4662.06 5807.06,4662.06 v1(5820,4675) v1@5815,4675
  Bottom Layer w12: v1@5824.45,4670.55 D3_MTR_L.2 5875.63,4550.71 D4_MTR_L.2
NetC28_MTR_R_1: C28_MTR_R.1 D3_MTR_R.2 D4_MTR_R.2 R35_MTR_R.1 R37_MTR_R.1 | length 602.5
  Top Layer w10: v1(2739.45,4680.55) 2773.94,4646.06 2792.4,4646.06 2945.89,4492.56 3002.91,4492.56 R35_MTR_R.1
  Bottom Layer w10: D3_MTR_R.2 2680.63,4560.71 D4_MTR_R.2 v1(2739.45,4680.55)
NetD1_1: D1.1 D2.1 Q5.2 R27.1
NetD2_2: D2.2 R26.2
NetD3_MTR_L_1: D3_MTR_L.1 JM1_MTR_L.2 L1_MTR_L.2 | length 309.7
  Bottom Layer w25: L1_MTR_L.2 5794.45,4750.55 D3_MTR_L.1 5930.97,4695.21 5930.97,4662.4 5980,4613.37 JM1_MTR_L.2
NetD3_MTR_R_1: D3_MTR_R.1 JM1_MTR_R.2 L1_MTR_R.2 | length 262.7
  Bottom Layer w30: JM1_MTR_R.2 2678.82,4480 2775,4576.18 L1_MTR_R.2
NetD4_MTR_L_1: D4_MTR_L.1 JM1_MTR_L.1 L2_MTR_L.1 | length 297
  Bottom Layer w25: L2_MTR_L.1 5784.06,4570.95 5833.56,4521.45 5833.56,4510.26 D4_MTR_L.1 5884.92,4480 JM1_MTR_L.1
NetD4_MTR_R_1: D4_MTR_R.1 JM1_MTR_R.1 L2_MTR_R.1 | length 322.7
  Bottom Layer w30: JM1_MTR_R.1 2643.63,4643.63 2643.63,4723.55 D4_MTR_R.1 2695.24,4745.94 L2_MTR_R.1
NetJ3_2: J3.2 R15.1 R16.1
NetJ3_3: J3.3 R13.1 R14.1
NetJ3_5: J3.5 R11.1 R12.1
NetJANTENNA_2: JANTENNA.2 Q3.E Q4.E
NetJANTENNA_MOD_1: JANTENNA_MOD.1 JRFID1.4
NetJANTENNA_MOD_2: JANTENNA_MOD.2 JRFID1.3
NetJSPK1_1: JSPK1.1 U10.2 | length 206.5
  Bottom Layer w12: U10.2 5906.02,5233.98 JSPK1.1
NetJSPK1_2: JSPK1.2 U10.4 | length 226.7
  Bottom Layer w12: U10.4 5857.2,5182.8 JSPK1.2
NetL1_MTR_L_1: L1_MTR_L.1 U10.7 | length 327.3
  Bottom Layer w12: U10.7 5861.02,5106.02 5875,5092.05 5875,4969.99
  Bottom Layer w25: L1_MTR_L.1 5875,4969.99
NetL1_MTR_R_1: L1_MTR_R.1 U7.2 | length 537.6
  Bottom Layer w12: U7.2 2865,4984.8 2865,4890
  Bottom Layer w25: L1_MTR_R.1 2865,4575.94 2865,4890
NetL2_MTR_L_2: L2_MTR_L.2 U10.5 | length 798
  Top Layer w20: L2_MTR_L.2 5915,4631.88 5915,5071.26 v1@5905,5081.26
  Bottom Layer w12: U10.5 5855.93,5157.2 5913,5100.13 v1(5913,5073.26)
NetL2_MTR_R_2: L2_MTR_R.2 U7.4 | length 137.4
  Bottom Layer w12: 2812.8,4901.85 U7.4
  Bottom Layer w25: L2_MTR_R.2 2812.8,4901.85
NetQ3_B: Q3.B Q4.B R22.1
NetR1_1: R1.1 U1.37
NetR2_1: R2.1 U1.36
NetR3_1: R3.1 U1.35
NetR17_1: R17.1 R19.1 U5.RXD
NetR18_2: R18.2 U5.CH_PD
NetR20_1: R20.1 R21.1 U5.RST
NetR25_1: R25.1 R26.1 U8.3
NetR28_1: R28.1 R30.2 U9.2
NetR31_2: R31.2 R32.1 U9.3
NetR32_2: R32.2 R33.1
NetR34_MTR_L_2: R34_MTR_L.2 R99_MTR_L.2 U11_MTR_L.7 | length 526.3
  Top Layer w12: U11_MTR_L.7 5455,4795 5515.07,4734.93 5566.09,4734.93 5581.78,4719.24 5581.78,4582.88 5570.94,4572.04 R34_MTR_L.2 R99_MTR_L.2
NetR35_MTR_L_2: R35_MTR_L.2 R36_MTR_L.2 R99_MTR_L.1 U11_MTR_L.3 | length 325.5
  Top Layer w12: R35_MTR_L.2 R36_MTR_L.2 ; U11_MTR_L.3 5505,4570 5515.94,4559.06 R36_MTR_L.2 ; R99_MTR_L.1 5620.82,4470.47 5594.04,4497.25 5548.22,4497.25 R36_MTR_L.2
NetR35_MTR_R_2: R35_MTR_R.2 R36_MTR_R.2 R99_MTR_R.1 U11_MTR_R.3 | length 355.5
  Top Layer w12: R35_MTR_R.2 R36_MTR_R.2 ; U11_MTR_R.3 3085,4529.53 R36_MTR_R.2 ; R99_MTR_R.1 3224.88,4435.47 3198.1,4462.25 3152.28,4462.25 R36_MTR_R.2
NetU6_3: U6.3 U7.16
NetU6_6: U6.6 U7.15
NetU6_8: U6.8 U10.16
NetU6_11: U6.11 U10.15
NetU9_6: U9.6 U9.7 | length 50
  Top Layer w20: U9.7 U9.6
NetULED_L1_2: ULED_L1.2 ULED_R1.4
RESET: C3.2 J1.5 R8.2 U1.4 | length 342.6
  Top Layer w12: J1.5 3372.44,4847.56 R8.2 3540.69,4847.56 3606.55,4913.42 U1.4
RFID_PULSE: R22.2 U1.44
RFID_READ: R23.2 R25.2 U1.41 U8.7
RFID_RXD: JRFID1.6
RST_WIFI: R20.2 U1.40
RXD_FTDI: J2.3 U1.9
RXD_RFID: JRFID1.7 U1.25
RXD_WIFI: U1.11 U5.TXD
SCL_3V: JTOP1.6 Q1.2 R4.2 U2.14
SCL_5V: Q1.3 R7.2 U1.19 | length 170.7
  Top Layer w12: U1.19 3954.25,5285.05 4040,5199.3 R7.2
SDA_3V: JTOP1.5 Q2.2 R5.2 U2.13
SDA_5V: Q2.3 R6.2 U1.20 | length 237.9
  Top Layer w12: U1.20 3973.48,5316.05 R6.2
SPK_N: U1.16 U10.10
SPK_P: U1.15 U10.9
TOP_LEDS: JTOP1.3 ULED_R1.2
TXD_FTDI: J2.2 U1.10
TXD_RFID: U1.26
TXD_WIFI: R17.2 U1.12
ULTRA_ECHO: JULTRA1.2 U1.23
ULTRA_TRIG: JULTRA1.3 U1.22
V3: AUX1.4 AUX2.4 C7.1 C8.1 C9.1 J2.5 J3.4 JTOP1.2 Q1.1 Q2.1 R4.1 R5.1 R18.1 U2.1 U2.6 U2.7 U3.2 U5.VCC | length 5479.5
  Top Layer w30: v1(3488.44,6024.68) 3489.4,6025.64 U3.2@3489.4,6054.87 ; v1(3490,5895) 3489.4,5894.4 3489.4,5789.13 3600.87,5789.13 v1(3605,5785)
  Mid-Layer Top w30: v1(3605,5785) 3681,5785 3803,5663 3974.47,5663 4017,5705.53 4017,5932 4140.82,6055.82 4140.82,6065.94 4179.07,6104.2 4504.2,6104.2 4697.9,5910.5 5435.71,5910.5 5980,5366.21 AUX2.4
  Mid-Layer Bottom w30: AUX1.4 2631.53,5391.53 2631.53,5678.64 2618.64,5691.53 2617.97,5691.53 2564.5,5745 2564.5,5999.5 2656.01,6091.01 2724.2,6091.01 2773.99,6140.8 2773.99,6187.86 2856.89,6270.76 2957.71,6270.76 2961.95,6275 3460,6275 3490,6245 v1(3490,5895) ; v1@3488.44,6016.56 v1(3488.44,6024.68)
V5: AUX1.2 AUX2.2 C4.2 C5.2 C10.1 C11.1 C12.1 C16.1 J1.2 J2.4 JARM_L1.2 JARM_R1.2 JRFID1.2 JTOP1.1 JULTRA1.4 R6.1 R7.1 R8.1 R23.1 R29.1 R33.2 R34_MTR_L.1 R34_MTR_R.1 U1.5 U1.17 U1.27 U1.38 U6.14 U7.1 U10.1 U11_MTR_L.2 U11_MTR_R.2 U101.5V ULED_L1.1 ULED_R1.1 | length 19612.3
  Top Layer w12: J1.2 3282.56,4660 3325.09,4702.53 3390.09,4702.53 R8.1 3512.44,4792.44 3638.55,4918.55 U1.5 3638.55,5188.55 3703.05,5253.05 U1.38@3468.05,5253.05 ; U1.38 U1.38@3468.05,5253.05 ; v1(3506.85,5291.85) U1.38@3468.05,5253.05 ; U1.27 3700.55,5395.35 3772.95,5322.95 3772.95,5262.05 3812.95,5222.05 U1.17
  Top Layer w25: 3703.05,5253.05 3772.95,5322.95 3905,5455 v1(3905,5495) ; v1(3850,5710) 3913.94,5646.06 U101.5V@3978.94,5646.06 ; v1(3915,5710) U101.5V@3978.94,5646.06 ; v1(3970,5725) 3980,5715 U101.5V ; v1(4036.06,5590) U101.5V ; v1(4750,4990) U6.14 ; U101.5V@3978.94,5646.06 U101.5V
  Top Layer w30: v1@3923.94,5590 U101.5V
  Mid-Layer Top w25: AUX1.2 2580,5553.37 2629.03,5602.4 2629.03,5677.6 2617.6,5689.03 2615.97,5689.03 2562.97,5742.03 2562.97,5996.48 2660,6093.51 2723.17,6093.51 2771.49,6141.83 2771.49,6187.54 2851.47,6267.51 3184.31,6267.51 3235.2,6318.41 3696.59,6318.41 3750.5,6264.5 3750.5,6151.57 3850,6052.07 v1(3850,5710) ; v1(3970,5725) 3970,5945 3980.5,5955.5 3983.43,5955.5 4009.5,5981.57 4009.5,5984.5 4180,6155 4540,6155 4750,5945 5450,5945 5855,5540 AUX2.2
  Mid-Layer Bottom w20: 2840,5505 2710,5635 2710,5805 2825,5920 3290,5920 3500,5710 3665,5710 3735,5640 3805,5640 3860,5585 v1(3910,5585)
  Mid-Layer Bottom w25: JARM_R1.2 2530,4870 2530,6200 2580,6250 2837.57,6306.96 3098.48,6345.81 3362.59,6366.42 3364.01,6365 3780,6365 3915,6230 v1(3915,5710) ; JTOP1.1 2795,6075 3245,6075 3295,6025 3295,5970 3460,5805 3520,5805 3584.5,5740.5 3623.43,5740.5 3627.93,5745 3685,5745 3760,5670 3825,5670 v1(3910,5585) ; J2.4 3445.5,5954.5 3445.5,5876.57 3471.57,5850.5 3628.5,5850.5 3769,5710 v1(3850,5710) ; v1(4036.06,5590) 4025,5590 4025,6295 4096.42,6366.42 5242.41,6366.42 5506.52,6345.81 5767.43,6306.96 6025,6250 6031.85,6243.15 6031.85,4846.85 5985,4800 JARM_L1.2
  Bottom Layer w12: v1(3506.85,5291.85) C4.2
  Bottom Layer w25: v1(4036.06,5590) 4080,5633.94 C10.1 ; v1(4750,4990) 4760,4980 C16.1
  Bottom Layer w30: v1(3905,5495) 3905,5580 v1(3910,5585)
VB: B1.3 B1.4 JBAT1.2 | length 3455.8
  Top Layer w25: JBAT1.2 2529.57,5270.43 2529.57,6204.57 2577.72,6252.72 2835.29,6309.68 3096.2,6348.54 3360.31,6369.14 4015,6369.14 4060.86,6369.14 4143.32,6286.68 4143.32,5822.35 ; 4143.32,5821.98 B1.3 ; B1.3@4277.49,5688.18 B1.3 ; B1.4 B1.3
VBATT: B1.2 B1.5 C13.2 C17.1 C22.1 C24.2 C27_MTR_L.1 C27_MTR_R.1 Q4.C Q5.3 R10.2 U3.3 U7.12 U8.8 U9.8 U10.12 U11_MTR_L.8 U11_MTR_R.8 U101.IN | length 13782.1
  Top Layer w20: v1(2770,5775) 2770,5700 2850,5620 U9.8 ; U3.3 3700,5753.72 3700,5580 3740,5540 4055,5540 4145,5450 4515,5450 4595,5530 4595,5680 4640,5725 4640,5861.12 4625.54,5875.58 4525.58,5875.58 4463.8,5813.8 B1.5
  Top Layer w25: v1(2790,5365) 2790,5415 2660,5545 2660,5700 2615,5745 2615,5930 2665,5980 2665,6031.63 2682.4,6049.03 2744.03,6049.03 2835,6140 2835,6200 2870,6235 3050,6235 3090,6275 3480,6275 3532.94,6222.06 3532.94,5996.06 3664.25,5864.75 3945.25,5864.75 4143.32,5666.68 4143.32,5560.92 4180.11,5524.13 4489.84,5524.13 4526.63,5560.92 4526.63,5645.6 4421.61,5750.62 4340.67,5750.62 B1.2@4285.64,5805.64 ; U101.IN 3775,5651.06 3775,5785 3820,5830 3929.94,5830 4110,5649.94 4110,5535 4160,5485 4500,5485 4560,5545 4560,5675 4445,5790 4419.39,5790 B1.5 B1.2 4277.49,5831.67 4321.39,5875.58 4457.38,5875.58 4530.59,5948.79 4530.59,6064.91 4500,6095.5 4500,6315 4554.17,6369.17 5230.43,6369.17 5494.54,6348.56 5755.45,6309.71 6013.02,6252.75 ; v1@5427.5,5197.5 5515,5285 6015,5285 6032.28,5302.28 6032.28,6233.49 6018.02,6247.75
  Mid-Layer Top w20: v1(2770,5775) 2861.5,5866.5 3303.5,5866.5 3430,5740 3680.75,5740 3789.75,5631 3987.72,5631 4049,5692.28 4049,5735 4067.2,5753.2 4335,5753.2 B1.5
  Bottom Layer w12: C13.2 2787.2,5314.65 U7.12 ; C24.2 5510.94,5157.2 U10.12
  Bottom Layer w25: C13.2 v1@2785,5365 ; v1@5435,5190 C24.2
  other v1: 5430,5195
pads on no net: B1.0 B1.1 B1.6 J3.0 J3.1 J3.8 J3.9 JRFID1.5 U2.3 U2.9 U2.10 U2.11 U2.12 U7.5 U7.7 U7.8 U7.9 U7.10 U8.5 U8.6 U10.8 U11_MTR_L.5 U11_MTR_L.6 U11_MTR_R.5 U11_MTR_R.6

## Keep-outs
Keep-Out Layer:
  lines w2: 2075,4245 2075,4405 2509.07,4405 2509.05,6244.45 2509.13,6246.66 2509.36,6248.85 2509.74,6251.03 2510.28,6253.17 2510.96,6255.27 2511.79,6257.32 2512.76,6259.3 2513.86,6261.21 2515.1,6263.04 2516.45,6264.78 2517.93,6266.42 2519.52,6267.96 2521.21,6269.38 2523,6270.68 2524.87,6271.85 2526.82,6272.88 2528.84,6273.78 2532.7,6275.06 2532.65,6275.26 2790.21,6332.22 3051.13,6371.07 3315.24,6391.67 3315.24,6392.05 5280.22,6392.05 ; 2075.34,4320.52 ccw(c7308.62,4260.06) 2755.11,1680.06 ; 2755.15,1680.22 ccw(c4267.65,3801.61) 5823.6,1711.88 ; 3313.45,6370.82 3313.45,6371.19 ; 5245.12,6332.09 5245.22,6332.05 ; 5822.5,1711.39 ccw(c1251.38,4260.06) 6485,4250.02 ; 6052.35,6244.45 6052.36,4405 6485,4405 6485,4245
  lines w10: 2685,1980 5905,1980 ; 2685,3960 5905,3960

## Silkscreen, mask and mechanical layers (free items; w line width, h text height)
Top Overlay:
  lines w10: 5220,4990 5220,6090 ; 5225,4995 5920,4995 5920,6095
Bottom Overlay:
  lines w10: 3435,4505 5205,4505 5205,5305 ; 3435,4510 3435,5310 5205,5310

## Text inside footprints (layer, text, board x,y; h text height)
J1: Top Overlay "1" at 3380,4580 h50 r90; Top Overlay "2" at 3280,4560 h50 r90; Top Overlay "5" at 3380,4920 h50 r90; Top Overlay "6" at 3280,4920 h50 r90